# Altium PCB Plastic_keyboard_IDC10.PcbDoc
Units mm, origin at the board's own origin, x right, y up, seen from the top; angles counter-clockwise.
Board outline 28 x 14 mm, 2 copper layers (Top Layer, Bottom Layer); 3 components, 10 nets, 20 pads, 0 vias.
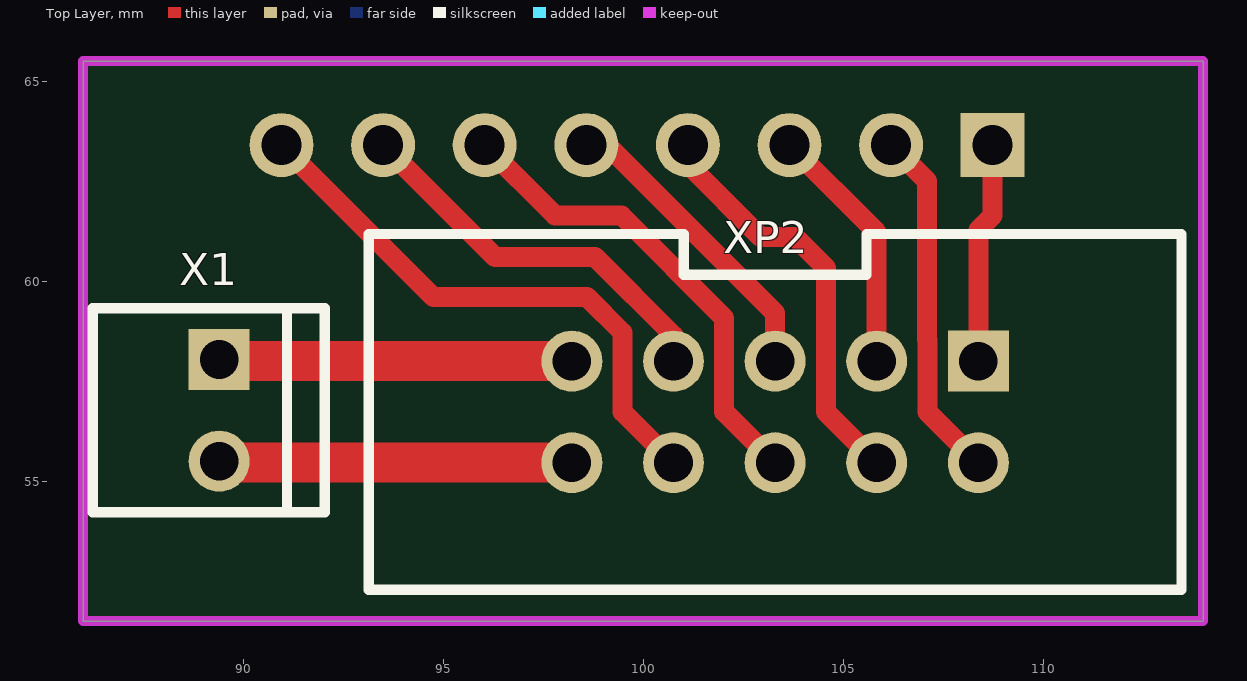
[diagram p0: Top Layer view]
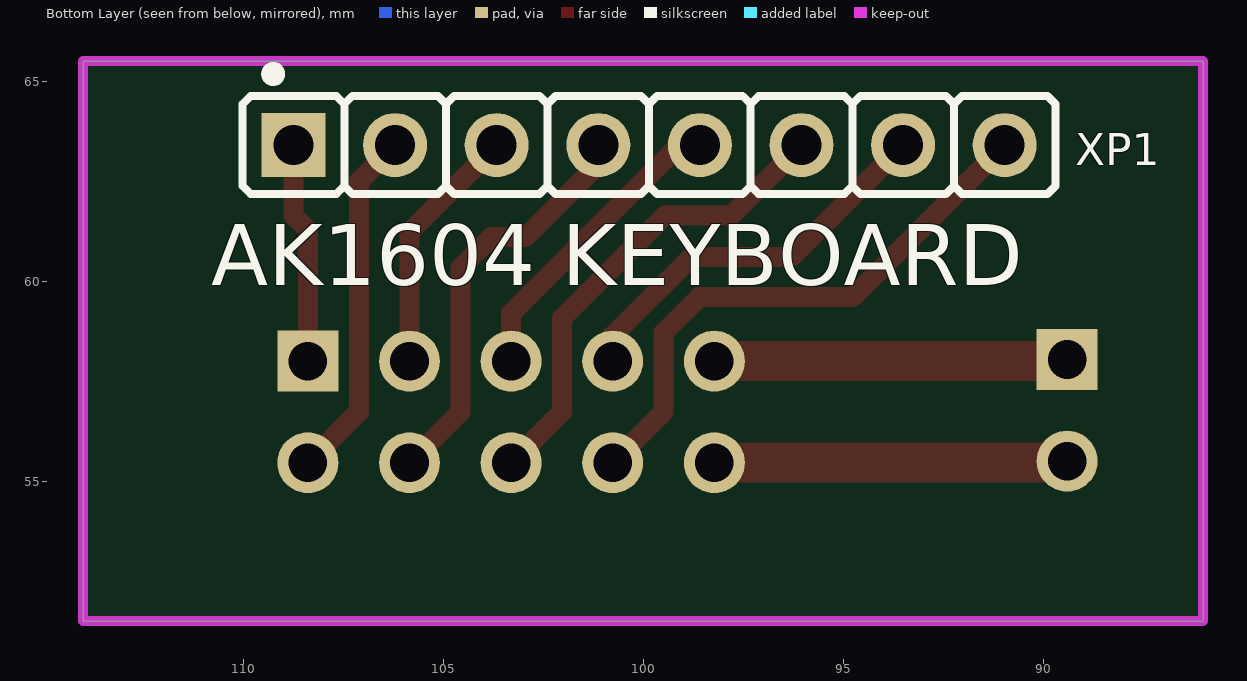
[diagram p1: Bottom Layer view, seen from below]

## Layer stack, top to bottom
Top Solder: solder mask 0.0102, Solder Resist, Dk 3.5
Top Layer: signal copper 0.0356
Dielectric 1: dielectric 0.32, FR-4, Dk 4.8
Bottom Layer: signal copper 0.0356
Bottom Solder: solder mask 0.0102, Solder Resist, Dk 3.5

## Board outline
86,51.5 86,65.5 114,65.5 114,51.5

## Design rules (kind name [scope] priority, off if disabled: settings)
Clearance [All] p1: gap=0.254 ignorepadtopadclearanceinfootprint=FALSE except(0: Arc-Hole Track-Hole SMDPad-Hole THPad-Hole Via-Hole Fill-Hole Poly-Hole Region-Hole Text-Hole)
PolygonConnect [All] p1: connectstyle=Relief reliefconductorwidth=0.254 reliefentries=4 polygonreliefangle="90 Angle" airgapwidth=0.254
RoutingVias [All] p1: holewidth=0.711 width=1.27 viastyle="Through Hole" minholewidth=0.711 minwidth=1.27 maxholewidth=0.711 maxwidth=1.27
SolderMaskExpansion [All] p1: expansion=0.102
Width [All] p1: maxlimit=3 minlimit=0.2 preferedwidth=0.5
30 further rules are at their usual default settings.

## Components (designator, comment, footprint, x,y, rotation, side; value= is the part's Value field where it differs from the comment)
X1 "WH-02" WH-02 89.4,58.04 r0 top
XP1 "PLS-08" PLS-08 108.74,63.4 r180 bottom
XP2 "BH-10" BH-10 108.38,58 r180 top

## Footprints (in the part's own frame and the unit in brackets; to place one, negate y for a bottom-side part, rotate by r counter-clockwise, add the part's x,y. Pads: shape width x height; smd on the part's side, far side on the other; paste and mask are expansions set on the pad)
BH-10 [mil]
  rect 60x60 hole 38 mask+1.97: 1(0,0)
  round 60 hole 38 mask+1.97: 2(0,100) 3(100,0) 4(100,100) 5(200,0) 6(200,100) 7(300,0) 8(300,100) 9(400,0) 10(400,100)
  silkscreen extent -200,-125 600,225, body extent -200,-115 600,215, height 362
PLS-08 [mm]
  rect 1.6x1.6 hole 1 mask+0.05: 1(0,0)
  round 1.6 hole 1 mask+0.05: 2(2.54,0) 3(5.08,0) 4(7.62,0) 5(10.16,0) 6(12.7,0) 7(15.24,0) 8(17.78,0)
  silkscreen extent -1.27,-1.23 19.05,1.93, body extent -1.27,-1.27 19.05,1.27, height 10.1
WH-02 [mil]
  rect 60x60 hole 38 mask+1.97: 1(0,0)
  round 60 hole 38 mask+1.97: 2(0,-100)
  silkscreen extent -124,-150 104,50

## Nets (pads, with @x,y where several pads share a name; then routed paths per layer and width w, separated by ;. In a path a pad name is that pad's centre, name@x,y a point inside that pad or via, vN(x,y) a via of type N, cw(c..) or ccw(c..) an arc to the next point about the centre after c; other vN are vias at no path point)
NetX1_2: X1.2 XP2.10 | length 8.8
  Top Layer w1: X1.2 89.44,55.46 XP2.10
NetXP1_1: XP1.1 XP2.1 | length 5.5
  Top Layer w0.5: XP2.1 108.38,61.28 108.74,61.64 XP1.1
NetXP1_2: XP1.2 XP2.2 | length 8.8
  Top Layer w0.5: XP1.2 107.1,62.5 107.1,58.536 107.106,58.53 107.106,56.734 XP2.2
NetXP1_3: XP1.3 XP2.3 | length 6.3
  Top Layer w0.5: XP1.3 105.84,61.22 XP2.3
NetXP1_4: XP1.4 XP2.4 | length 10.4
  Top Layer w0.5: XP1.4 101.12,62.92 102.94,61.1 103.8,61.1 104.566,60.334 104.566,56.734 XP2.4
NetXP1_5: XP1.5 XP2.5 | length 7.7
  Top Layer w0.5: XP1.5 99.1,63.4 103.3,59.2 XP2.5
NetXP1_6: XP1.6 XP2.6 | length 11.9
  Top Layer w0.5: XP1.6 97.8,61.64 99.46,61.64 102.026,59.074 102.026,56.734 XP2.6
NetXP1_7: XP1.7 XP2.7 | length 9.9
  Top Layer w0.5: XP1.7 96.3,60.6 98.8,60.6 100.76,58.64 XP2.7
NetXP1_8: XP1.8 XP2.8 | length 14.2
  Top Layer w0.5: XP1.8 94.76,59.6 98.6,59.6 99.486,58.714 99.486,56.734 XP2.8
VIN: X1.1 XP2.9 | length 8.8
  Top Layer w1: X1.1 89.44,58 XP2.9

## Keep-outs
Keep-Out Layer:
  the board outline again, w0.254

## Silkscreen, mask and mechanical layers (free items; w line width, h text height)
Bottom Overlay:
  text "AK1604 KEYBOARD" at 110.8,59.9 h1.52
Mechanical 3:
  circle w0.254: c130.7,41.2 r0.361
  circle w0.254: c132.1,41.2 r0.361
  circle w0.254: c128,41.2 r0.361
  circle w0.254: c129.4,41.2 r0.361
  circle w0.254: c126.7,41.2 r0.361
  circle w0.254: c125.3,41.2 r0.361
  circle w0.254: c130.7,42.4 r0.361
  circle w0.254: c132.1,42.4 r0.361
  circle w0.254: c128,42.4 r0.361
  circle w0.254: c129.4,42.4 r0.361
  circle w0.254: c126.7,42.4 r0.361
  circle w0.254: c125.3,42.4 r0.361
  circle w0.254: c125.6,45.4 r0.361
  circle w0.254: c127,45.4 r0.361
  circle w0.254: c129.7,45.4 r0.361
  circle w0.254: c128.3,45.4 r0.361
  circle w0.254: c132.4,45.4 r0.361
  circle w0.254: c131,45.4 r0.361
  circle w0.254: c133.7,45.4 r0.361
  circle w0.254: c134.9,45.4 r0.361
  circle w0.254: c135.7,42.4 r0.361
  circle w0.254: c135.7,41.2 r0.361
  lines w0.254: 116.8,44.6 116.8,71.8 143.3,71.8 143.3,44.6 116.8,44.6 ; 118.7,58.8 118.7,62.9 122.8,62.9 122.8,58.8 118.7,58.8 ; 118.7,66 122.8,66 122.8,70.1 118.7,70.1 118.7,66 ; 118.8,52.2 118.8,56.3 122.9,56.3 122.9,52.2 118.8,52.2 ; 118.9,46.4 118.9,50.5 123,50.5 123,46.4 118.9,46.4 ; 123.8,40 136.6,40 136.6,44.6 123.8,44.6 123.8,40 ; 125.7,58.8 125.7,62.9 129.8,62.9 129.8,58.8 125.7,58.8 ; 125.7,66 129.8,66 129.8,70.1 125.7,70.1 125.7,66 ; 125.8,52.2 125.8,56.3 129.9,56.3 129.9,52.2 125.8,52.2 ; 125.9,46.4 125.9,50.5 130,50.5 130,46.4 125.9,46.4 ; 132,58.9 132,63 136.1,63 136.1,58.9 132,58.9 ; 132,66.1 136.1,66.1 136.1,70.2 132,70.2 132,66.1 ; 132.1,52.3 132.1,56.4 136.2,56.4 136.2,52.3 132.1,52.3 ; 132.2,46.5 132.2,50.6 136.3,50.6 136.3,46.5 132.2,46.5 ; 137.6,58.9 137.6,63 141.7,63 141.7,58.9 137.6,58.9 ; 137.6,66.1 141.7,66.1 141.7,70.2 137.6,70.2 137.6,66.1 ; 137.7,52.3 137.7,56.4 141.8,56.4 141.8,52.3 137.7,52.3 ; 137.8,46.5 137.8,50.6 141.9,50.6 141.9,46.5 137.8,46.5
  text "1" at 120.4,67.2 h1.52
  text "2" at 127.5,67.2 h1.52
  text "3" at 133.9,67.2 h1.52
  text "A" at 139.4,67.2 h1.52
  text "4" at 120.361,60.1 h1.52
  text "5" at 127.461,60.1 h1.52
  text "6" at 133.861,60.1 h1.52
  text "B" at 139.361,60.1 h1.52
  text "7" at 120.3,53.4 h1.52
  text "8" at 127.4,53.4 h1.52
  text "9" at 133.8,53.4 h1.52
  text "C" at 139.3,53.4 h1.52
  text "*" at 120.361,47.8 h1.52
  text "0" at 127.461,47.8 h1.52
  text "#" at 133.861,47.8 h1.52
  text "D" at 139.361,47.8 h1.52
  text "AK1604 KEYBOARD" at 124.4,43.3 h0.8